# Altium PCB PCB1.PcbDoc (part 2 of 3)
Units mil, origin at the board's own origin, x right, y up, seen from the top; angles counter-clockwise.
Board outline 3937.01 x 3937.01 mil, 4 copper layers (L1, L2, L3, L4), stack 61.851 mil thick; 165 components, 197 nets, 827 pads, 400 vias.
Unrouted connection lines stored in the file: 1.
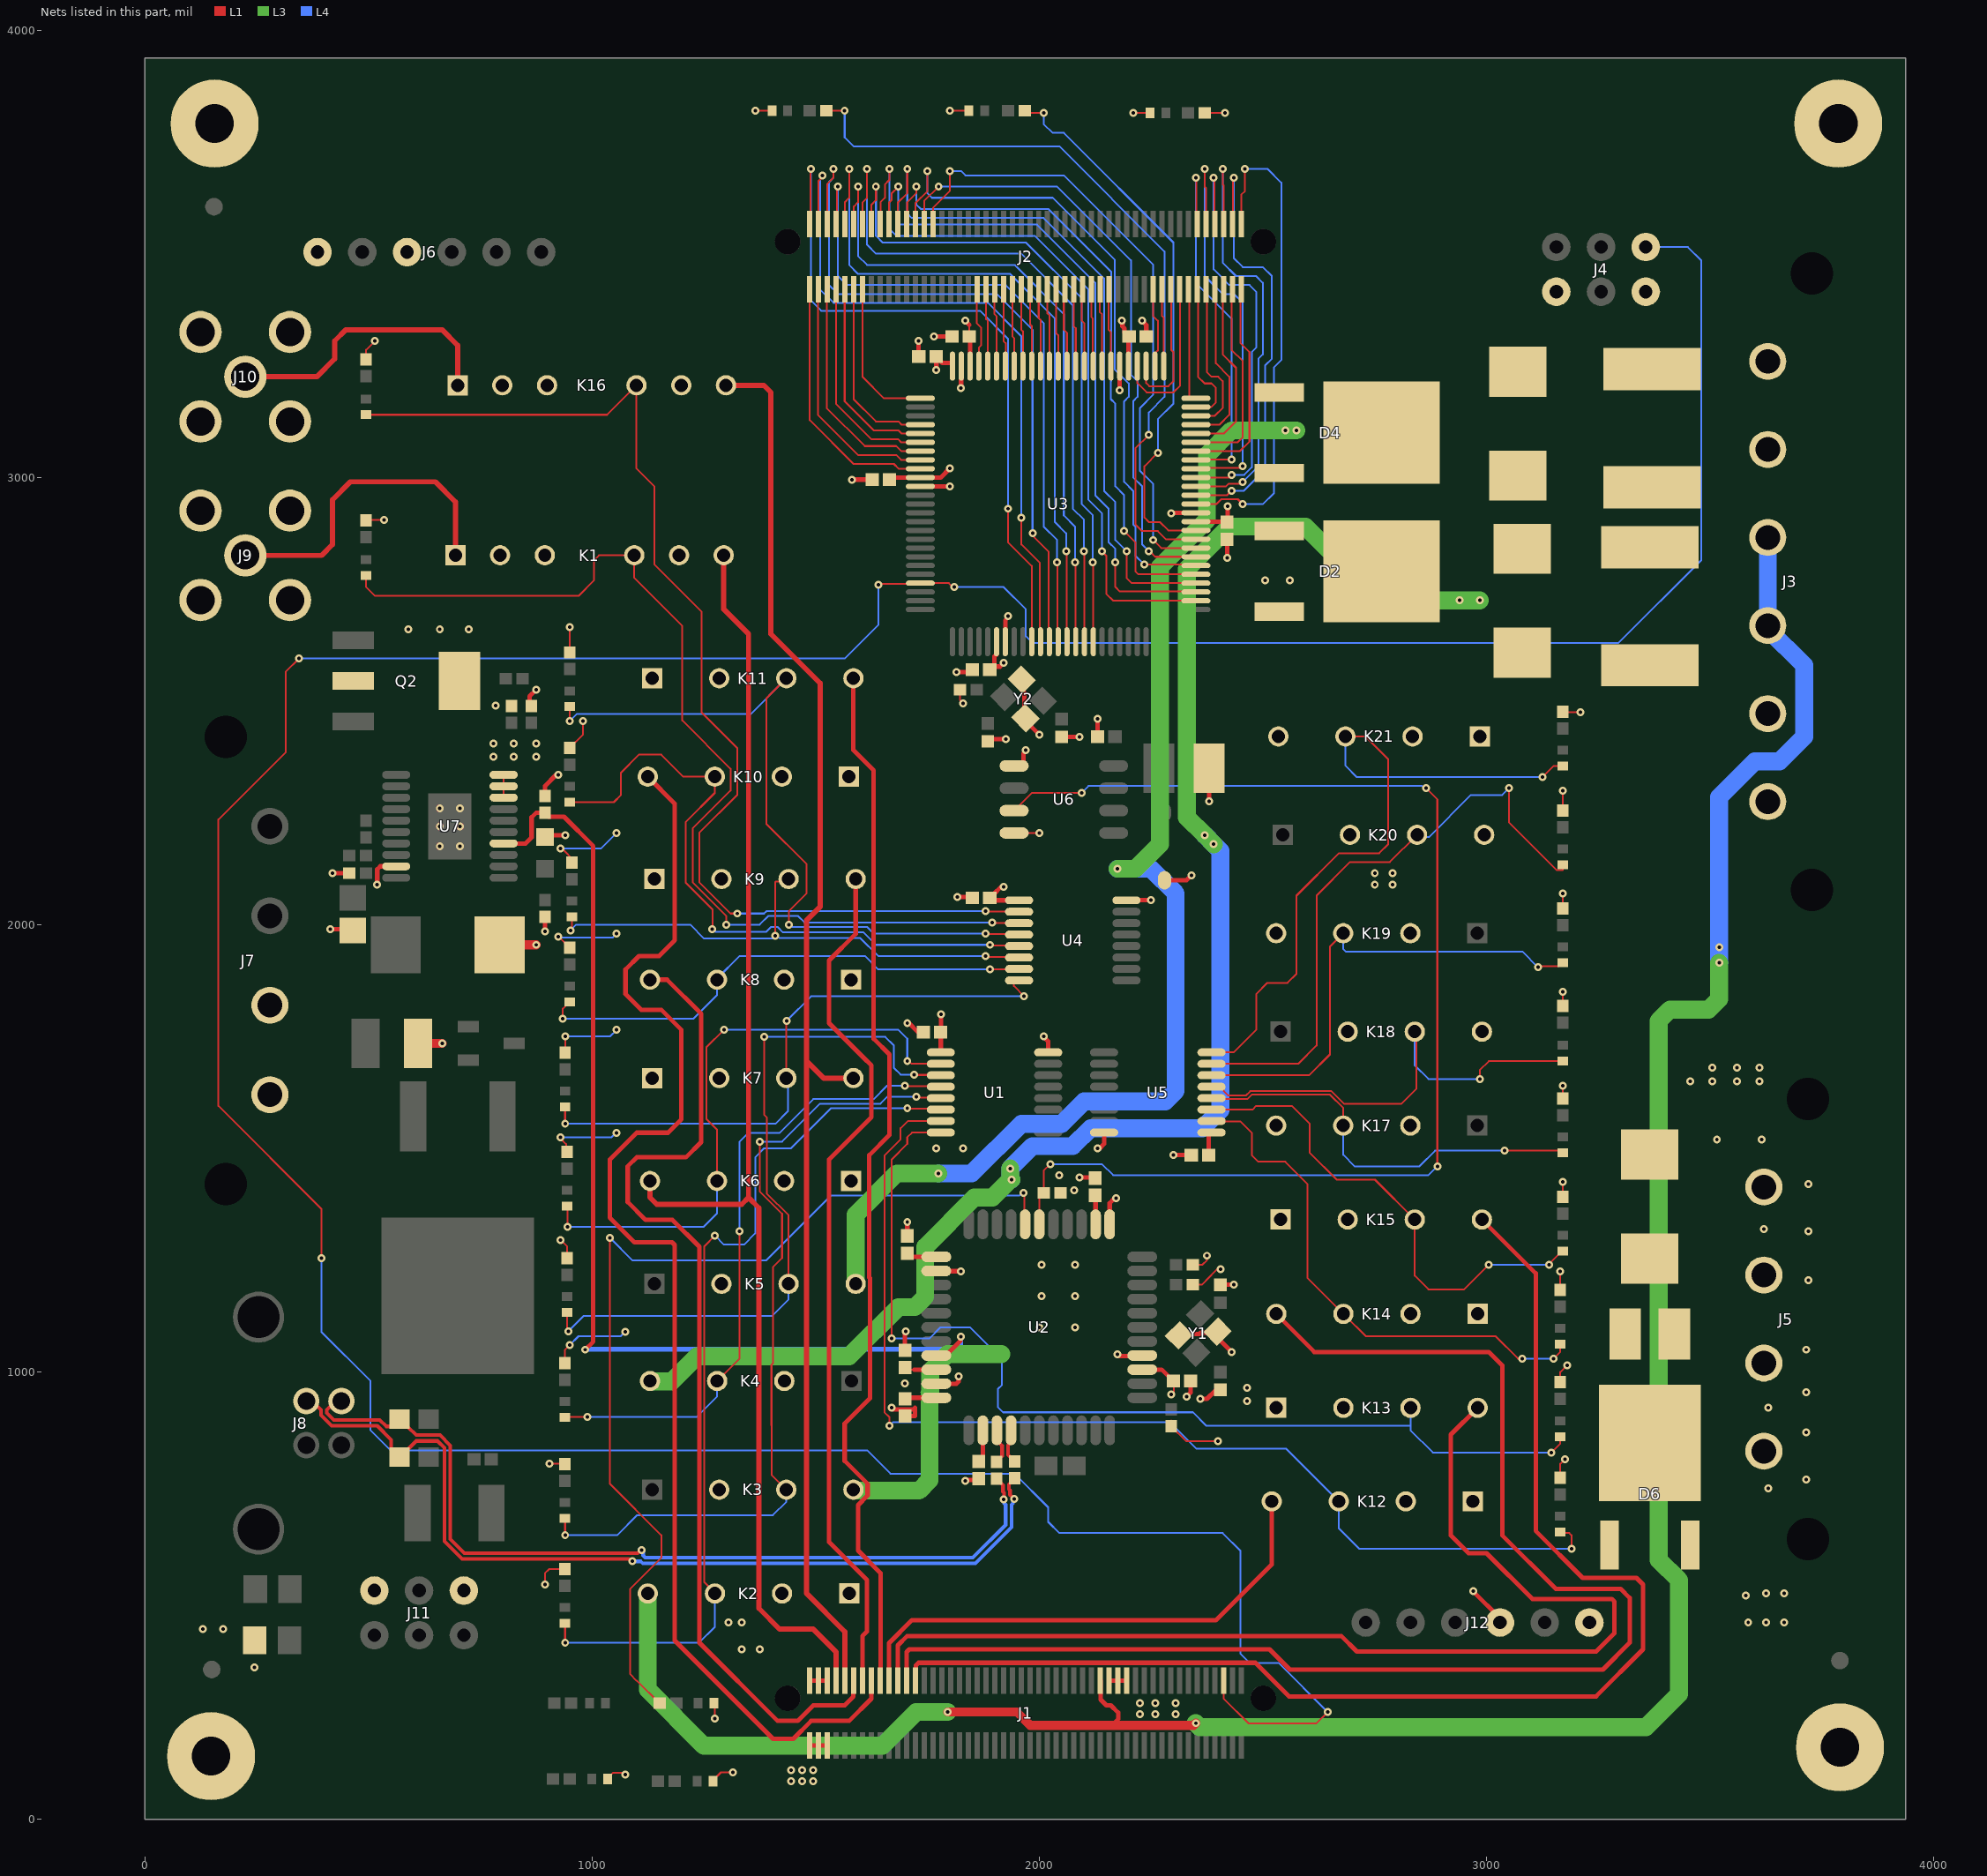
[diagram p4: the nets of this part, all layers, seen from the top]

## Part data (continued)
R18: library part R01-0402-01-00360-2, "RES SMD 100K OHM 1% 1/16W 0402", Case/Package=0402, Manufacturer=Yageo, Max Operating Temperature=155°C, Min Operating Temperature=-55°C, Power Rating=62.5mW, Temperature Coefficient="100 ppm/ºC", Tolerance=1%, Voltage Rating=50V, Composition="Thick Film", Features="Automotive AEC-Q200, Moisture Resistant", Height=370µm, Length=990.6µm, Manufacturer P/N=AC0402FR-07100KL, Number of Terminations=2, Packaging="Tape & Reel", RoHS=Yes, Width=508µm
R19: library part R01-0603-01-00000-4, "RES SMD 0 OHM 1% 1/10W 0603", Case/Package=0603, Manufacturer=Yageo, Max Operating Temperature=155°C, Min Operating Temperature=-55°C, Power Rating=100mW, Temperature Coefficient="200 ppm/ºC", Tolerance=1%, Voltage Rating=50V, Voltage Rating1=75V, Composition="Thick Film", Features="Automotive AEC-Q200, Moisture Resistant", Height=550µm, Length=1.6002µm, Manufacturer P/N=AC0603FR-070RL, Number of Terminations=2, Packaging="Tape & Reel", RoHS=Yes, Width=800µm
U1 U4 U5: library part CMP-0005-0001-00001-1, "50-V, 7-ch darlington transistor array, -40 to 105C 16-TSSOP -40 to 105", Case/Package=TSSOP, Manufacturer="Texas Instruments", Max Operating Temperature=-40°C, Min Operating Temperature=105°C, Voltage Rating=50V, Height=1.2mm, Length=5mm, Manufacturer P/N=ULN2003AIPWR, Mounting Technology=SMD, Pins=16, RoHS Compliant=yes, Width=4.4mm
U2: library part U01-0007-01-00002-1, "8-bit AVR MCU, 32 KB, 2560 Bytes, 16 MHz, 2.7 to 5.5V, TQFP-44, RoHS", Case/Package=TQFP, Frequency=16MHz, Manufacturer=Microchip/Atmel, Max Operating Temperature=85°C, Max Supply Voltage=5.5V, Min Operating Temperature=-40°C, Minimum Supply Voltage=2.7V, Contact Plating=-, Core Architecture=AVR, Height=1.05mm, Interface="I2C, I2S, SPI, UART, USART, USB", Manufacturer P/N=ATMEGA32U4-AU, Max Frequency=16MHz, Memory Size=32KB, Memory Type=Flash, Mounting Technology=SMD, Number of A/D=12, Number of I/O=26, Number of Programmable I/O=26, Oscillator Type=External, Peripherals="Brown-out Detect/Reset, POR, PWM, WDT", Pins=44, RAM Size="2.5 kB", RoHS=Yes, Watchdog Timer=Yes, Width=10mm
U3: library part U01-0007-01-00000-1, "AVR ATmega Microcontroller 8-bit 16MHz 256KB FLASH TQFP100", Case/Package=A, Frequency=16MHz, Manufacturer=Microchip, Max Operating Temperature=85°C, Max Supply Voltage=5.5V, Min Operating Temperature=-40°C, Minimum Supply Voltage=4.5V, Contact Plating=Tin, Core Architecture=AVR, Height=1.2mm, Interface="I2C, SPI, UART", Manufacturer P/N=ATMEGA2560-16AU, Max Frequency=16MHz, Memory Size=256KB, Memory Type=FLASH, Mounting Technology=SMD, Number of A/D="1 AD / 16 channels", Number of I/O=86, Number of Programmable I/O=86, Oscillator Type=External, Peripherals="Brown-out Detect/Reset, POR, PWM, WDT", Pins=100, RAM Size=8KB, RoHS=Yes, Watchdog Timer=Yes, Width=16.25mm
U6: library part CMP-00023-00003-1, "DS1682 Series 5.5 V I2C 2-Wire Serial Surface Mount Real Time Clock - SOIC-8", Case/Package=SOIC-8, Manufacturer=Maxim, Max Operating Temperature=85°C, Max Supply Voltage=5.5V, Min Operating Temperature=-40°C, Min Supply Voltage=2.5V, Height="1.5 mm", Interface=I2C, Length="5 mm", Manufacturer P/N=DS1682S+, Mounting Technology=SMD, Pins=8, RoHS Compliant=Yes, Width="4 mm"
U7: library part CMP-001-00084-4, "4.5-V to 60-V, 31mΩ, 0.6-6A eFuse with output power limiting and surge protection 20-HTSSOP -40 to 125", Manufacturer="Texas Instruments", Height=1.2mm, Length=6.5mm, Manufacturer P/N=TPS26631PWPR, Mounting Type=SMD, Number Pins=20, RoHS=Yes, Thickness=1mm, Width=4.4mm
Y1 Y2: library part Y01-0001-01-00000-11, "16MHz ±10ppm 16pF 80Ω SMD-2520_4P", Case/Package=SMD-2520_4P, Frequency=16MHz, Load Capacitance=16pF, Manufacturer=SEIKO-EPSON, Max Operating Temperature=85°C, Min Operating Temperature=-40°C, ESR=80, Manufacturer P/N=Q24FA20H0024700, Mounting Technology=SMD, Pins=4, RoHS Compliant=yes
Z1 Z2: library part Z01-0603-01-00000-1, "ESD Suppressor Multilayer Varistor 5V Automotive 2-Pin Case 0603", Capacitance=0.5pF, Case/Package=0603, Clamping Voltage=20V, Leakage Current=50nA, Manufacturer=Bourns, Max Operating Temperature=85°C, Min Operating Temperature=-40°C, Voltage=5V, Contact Plating=tin, Depth=800µm, Length=1.6mm, Manufacturer P/N=CG0603MLC-05E, Number Pins=2, Parameter=1ns, RoHS=Yes, Thickness=800µm, Width=800µm

## Via types
v1: diameter 17.72, hole 7.87, L1 to L4, 396 vias
v2: diameter 50, hole 28, L1 to L4, 4 vias

## Nets (pads, with @x,y where several pads share a name; then routed paths per layer and width w, separated by ;. In a path a pad name is that pad's centre, name@x,y a point inside that pad or via, vN(x,y) a via of type N, cw(c..) or ccw(c..) an arc to the next point about the centre after c; other vN are vias at no path point)
+5V: C1.2 C2.2 C3.2 C4.2 C5.2 C6.2 C7.2 C8.2 C9.2 C10.2 C11.2 C12.2 C13.2 C14.2 C16.2 D1.1 J1.1 J1.3 J1.5 J4.2 J6.1 J11.2 J12.1 K1.2 K2.2 K3.2 K4.2 K5.2 K6.2 K7.2 K8.2 K9.2 K10.2 K11.2 K12.2 K13.2 K14.2 K15.2 K16.2 K17.2 K18.2 K19.2 K20.2 K21.2 Q2.2 Q2.4 R1.2 R4.2 R5.2 R6.2 R7.2 R8.2 R21.1 R22.1 R23.1 R24.1 R25.1 R26.1 R27.1 R28.1 R29.1 R30.1 R31.1 R32.1 R33.1 R34.1 R35.1 R36.1 R37.1 R38.1 R39.1 R40.1 R41.1 R42.1 U1.9 U2.2 U2.14 U2.24 U2.34 U2.42 U2.44 U3.10 U3.31 U3.61 U3.80 U3.98 U3.100 U4.9 U5.9 U6.1 U7.18 U7.19 U7.20 | length 3515.4
  L1 w4: R22.1@495,2903.7 496.3,2905 v1(535,2905) ; R32.1@495,3263.7 495,3285 v1(515,3305) ; U7.18@802.6,2283.98 U7.19@802.6,2309.57 U7.20@802.6,2335.16 ; R8.2@818.7,2490 R8.2@820,2488.7 ; v1(895,525) 895,550 904.49,559.49 R28.1@939.66,559.49 ; v1(905,795) 939.23,795 R34.1@939.66,794.58 ; v1(925,1973.61) R24.1@950,1948.61 ; v1(930,1295) 944.66,1280.34 R23.1@944.66,1254.49 ; v1(930,1525) 930,1521.67 942.13,1509.54 942.13,1494.64 R29.1@944.66,1492.11 ; v1(930,2170) 933.61,2170 960,2143.61 R30.1@955,2138.61 ; R40.1@939.66,1019.49 939.66,1049.66 v1(950,1060) ; R35.1@940,1713.61 940.86,1714.47 v1(940.86,1750) ; R36.1@950,2395.11 980,2425.11 v1(980,2455) ; R41.1@950,2608.61 v1(950,2665) ; C9.2@1665,2995 C9.2@1665.31,2994.69 ; C1.2@1700,940 C1.2@1702.52,942.52 ; C2.2@1705,1265.71 C2.2@1713.23,1257.48 ; C4.2@1710,1020 C4.2@1700,1010 1704.49,1005.51 1720,1005.51 ; U2.44@1747.48,942.52 U2.44@1769.68,942.52 ; C10.2@1769.29,3270 1770,3269.29 C10.2@1781.46,3257.83 ; C16.2@1779.92,1753.5 1780,1753.58 C16.2@1781.42,1755 ; U3.100@1802.39,3257.83 1804.4,3255.81 1805.99,3254.22 U3.100@1805.99,3248.7 ; R1.2@1822.6,2525 1822.6,2502.4 v1(1830,2495) ; v1@1835,3349.47 v1(1835,3350) ; 1843.58,3340.88 C11.2@1843.58,3315 C11.2@1845.37,3313.22 ; C6.2@1864.14,799.14 C6.2@1865,800 C6.2@1874.02,809.02 ; C8.2@1899.43,2580 C8.2@1900,2580.57 ; U3.31@1904.42,2604.16 U3.31@1904.42,2632.56 ; U4.9@1930.38,2054.57 U4.9@1954.92,2054.57 ; R5.2@2045,1402.4 R5.2@2047.4,1400 ; C3.2@2125,1395 C3.2@2125.98,1394.02 ; C12.2@2192.85,3322.85 C12.2@2200.71,3315 C12.2@2199.7,3313.99 ; R7.2@2295,891.3 2301.3,885 R7.2@2295,878.7 2328.7,845 v1(2400,845) ; v1(2295,950) 2300.6,955.6 2300.6,979.4 C5.2@2300,980 C5.2@2299.21,980 ; R6.2@2343.7,1195 2363.48,1195 2373.41,1204.93 2373.41,1205.32 2398.09,1230 v1(2405,1230) ; R4.2@2343.7,1240 2365,1240 2375,1250 v1(2375,1260) ; R21.1@2370,3815 v1(2415,3815) ; U5.9@2378.58,1529.1 2384.92,1535.43 U5.9@2385.08,1535.43 ; R25.1@3165,763.7 3165,795 v1(3175,805) ; R31.1@3165,977.4 3165,1000 v1(3180,1015) ; R37.1@3165,1183.61 v1(3165,1225) ; R26.1@3170,1391.23 v1(3170,1425) ; R38.1@3170,1611.23 v1(3170,1640) ; R42.1@3170,1818.7 v1(3170,1850) ; R27.1@3170,2036.23 v1(3170,2070) ; R33.1@3170,2255 v1(3170,2300) ; R39.1@3170,2475.8 3170.8,2475 v1(3210,2475) ; J4.2@3355.97,3415 J4.2@3357.99,3415 ; C8.2@1889.29,2570 1896.41,2577.12 C8.2@1889.29,2570
  L1 w10: J1.1@1486.97,310.51 J1.3@1506.65,310.51 J1.5@1526.34,310.51 ; C9.2@1664.6,2999.69 U3.10@1734.14,2999.69 1779.69,2999.69 v1(1800,3020) ; C1.2@1702.52,942.52 U2.44@1747.48,942.52 ; C2.2@1713.23,1257.48 U2.34@1769.68,1257.48 ; 1720,1005.51 U2.42@1769.68,1005.51 ; v1(1770,3240) C10.2@1770,3269.29 ; U1.9@1779.92,1714.57 1779.92,1753.5 C16.2@1779.92,1753.66 ; C16.2@1780,1753.58 C16.2@1779.92,1753.66 ; v1(1780,1800) 1780,1763.58 C16.2@1779.92,1763.5 ; C10.2@1781.46,3257.83 1783.48,3255.81 1804.4,3255.81 1805.16,3255.81 1805.99,3254.97 U3.100@1805.99,3254.22 ; v1@1835,3349.47 1843.58,3340.88 ; U3.98@1845.37,3248.7 C11.2@1845.37,3313.22 ; C6.2@1863.71,799.57 C6.2@1864.14,799.14 ; C6.2@1874.02,809.02 U2.2@1874.02,869.68 ; C8.2@1896.41,2577.12 1912.12,2577.12 v1(1920,2585) ; C8.2@1900,2580.57 1900,2599.74 U3.31@1904.42,2604.16 ; v1(1920,2085) 1915.08,2085 1897.87,2067.79 1897.87,2055.95 1899.25,2054.57 U4.9@1930.38,2054.57 ; U6.1@1943.78,2355 1957.8,2355 1965,2362.2 1965,2382.91 1970,2387.91 v1(1970,2390) ; C3.2@2121.25,1398.75 C3.2@2125,1395 ; U2.24@2125.98,1330.31 C3.2@2125.98,1394.02 ; v1(2185,3350) 2186.1,3348.9 2186.1,3337.36 2190.75,3332.72 2190.75,3324.17 2192.07,3322.85 C12.2@2192.85,3322.85 ; U3.80@2199.7,3248.7 C12.2@2199.7,3313.99 ; U2.14@2230.31,1005.51 2273.7,1005.51 C5.2@2299.21,980 ; D1.1@2280,2099.21 2329.21,2099.21 v1(2340,2110) ; U3.61@2350.29,2901.26 2418.74,2901.26 C13.2@2420,2900 ; C7.2@2378.58,1485 U5.9@2378.58,1529.1 ; C13.2@2421.29,2905 v1(2421.29,2935.32) ; C16.2@1779.92,1753.66 1775,1758.58 C16.2@1779.92,1763.5 ; C16.2@1779.92,1753.66 C16.2@1779.92,1763.5
  L4 w4: v1(925,1973.61) 926.97,1971.64 1046.64,1971.64 v1(1055,1980) ; v1(930,1525) 1043.99,1525 1053.99,1535 v1(1055,1535) ; v1(930,2170) 1020,2170 v1(1055,2205) ; v1(940.86,1750) 1040,1750 v1(1055,1765) ; v1(950,1060) 970,1080 1063.99,1080 1073.99,1090 v1(1075,1090)
  other v1: 1335,380 1375,380 1305,440 1335,440 2465,935 2465,965 1700,975 2078.51,1406.49 2045,1440 1770,1500 1830,1500 2750,2090 2790,2090 2750,2115 2790,2115 780,2375 825,2375 875,2375 780,2405 825,2405 875,2405 785,2490 590,2660 660,2660 725,2660
+6V: D6.3 D8.2 F4.2 K3.4 K17.4 K18.4 K19.4 K20.4 | length 622.6
  L3 w4: 1736.33,955 1755.55,955 1759.68,955
  L3 w40: K3.4@1584.66,737.1 1585.67,736.09 1589.4,736.09 1590.49,735 1731.25,735 1754.68,758.43 1754.68,954.13 1755.55,955 1756,955.45 1756,1001.57 1794.43,1040 1915,1040
  other v1: 2000,1100 2080,1100 2005,1170 2080,1170 2005,1240 2080,1240 3455,1650 3505,1650 3560,1650 3610,1650 3505,1680 3560,1680 3610,1680
+6V_In: F4.1 J5.1 J5.2
  other v1: 3630,740 3715,760 3715,865 3630,920 3715,955 3715,1050
+20V: D2.3 D3.1 F2.2 K4.4 | length 3668.1
  L3 w4: K4.4@1130,980 K4.4@1131.72,978.28
  L3 w40: K4.4@1131.72,978.28 1132.44,978.99 1178.99,978.99 1235,1035 1575,1035 1685,1145 1721.57,1145 1745,1168.43 1745,1280 1855,1390 1895,1390 v1@1935,1430 ; v1(1935,1455) v1@1935,1430 ; v1(1937.86,1430) v1@1935,1430 ; v1(2390,2180) v1(2370,2200) 2330,2240 2330,2795 2425,2890 2595,2890 2760,2725 v1(2940,2725) v1(2985,2725)
  L4 w40: v1(1937.86,1430) 1935,1432.86 v1(1935,1455) 1985,1505 2075,1505 2115,1545 2365,1545 2405,1585 2405,2165 v1(2390,2180) v1(2370,2200)
+20V_In: F2.1 J3.1 J3.2
-20V: D4.1 D4.2 D5.2 F3.2 K5.4 | length 2835.4
  L1 w10: D4.2@2535,3011.5 D4.2@2536.65,3009.84
  L3 w40: K5.4@1589.66,1197.1 1589.66,1351.88 1681.77,1444 v1(1774.33,1444) ; v1(2175,2125) 2215,2125 2270,2180 2270,2800 2375,2905 2375,3050 2430,3105 v1(2575,3105)
  L4 w40: v1(1774.33,1444) 1849,1444 1960,1555 2050,1555 2100,1605 2281.57,1605 2305,1628.43 2305,2070 2250,2125 v1(2175,2125)
  other v1: 2550,3105
-20V_In: F3.1 J3.5 J3.6
A: J1.7 K1.4 K6.4 | length 2933.1
  L1 w11.55: K6.4@1129.66,1427.1 1129.66,1390.34 1145,1375 1335,1375 1350,1390 ; K1.4@1294.66,2825.88 1294.66,2705.34 1350,2650 1350,1390 ; J1.7@1546.02,310.51 1546.02,373.98 1494.79,425.21 1419.79,425.21 1373.22,471.78 1373.22,1366.78 1350,1390
ALARM: R13.1 U3.59 | length 1707.8
  L1 w4: R13.1@1523.7,3820 v1(1565,3820) ; v1(2245,3095) 2215,3065 2215,2895 2230,2880 2265,2880 2283.11,2861.89 U3.59@2350.29,2861.89
  L4 w4: v1(1565,3820) 1565,3760 1585,3740 2045,3740 2280,3505 2280,3180 2245,3145 v1(2245,3095)
B: J1.9 K7.4 K16.4 | length 3200.3
  L1 w11.55: K16.4@1299.66,3205.88 1384.12,3205.88 1400,3190 1400,2650 1510,2540 1510,2040 1480,2010 1480,1695 ; J1.9@1565.71,310.51 1565.71,419.29 1480,505 1480,1695 ; K7.4@1584.66,1657.1 1517.9,1657.1 1480,1695
C: J1.11 K8.4 | length 2261.6
  L1 w10: K8.4@1129.66,1877.1 1167.9,1877.1 1244,1801 1244,1514 1210,1480 1100,1480 1080,1460 1080,1380 1120,1340 1180,1340 1240,1280 1240,395 1415,220 1460,220 1495,255 1565,255 1584.63,274.63 1584.63,309.75 J1.11@1585.39,310.51
COIL1: D14.1 K1.3 U4.11 | length 2349
  L1 w4: D14.1@494.66,2780.44 494.66,2755.34 515,2735 970,2735 1005,2770 1005,2815 1015.88,2825.88 K1.3@1094.66,2825.88 1094.66,2775.34 1202,2668 1202,2456.69 1310,2348.69 1310,2300 1225,2215 1225,2095 1300,2020 v1(1300,2000) ; v1(1895,2005) 1895.81,2004.19 1954.11,2004.19 U4.11@1954.92,2003.39
  L4 w4: v1(1300,2000) 1375,2000 1395,2020 1460,2020 1475,2005 v1(1895,2005)
COIL2: D20.1 K2.3 U1.14 | length 2028
  L1 w4: D20.1@939.66,438.26 940,437.92 v1(940,395) ; K2.3@1274.66,507.1 1251,530.75 1251,1281 v1(1275,1305) ; v1(1705,1590) 1706.69,1588.31 1778.23,1588.31 U1.14@1779.92,1586.61
  L4 w4: v1(940,395) 1240,395 1274.66,429.66 K2.3@1274.66,507.1 ; v1(1275,1305) 1295,1285 1340,1285 1365,1310 1365,1480 1385,1500 1445,1500 1535,1590 v1(1705,1590)
COIL3: D26.1 K3.3 U1.13 | length 1860.9
  L1 w4: D26.1@939.66,673.26 940,672.92 v1(940,635) ; v1(1375,1515) 1375,1403.69 1425,1353.69 1425,1255 1405,1235 1405,1020 1401.36,1016.36 1401.36,881.13 1401.75,880.73 1401.75,770 K3.3@1434.66,737.1 ; v1(1725,1615) 1726.4,1613.6 1778.52,1613.6 U1.13@1779.92,1612.2
  L4 w4: v1(940,635) 1056.25,635 1101.25,680 1404.66,680 1434.66,710 K3.3@1434.66,737.1 ; v1(1375,1515) 1425,1515 1510,1600 1645,1600 1660,1615 v1(1725,1615)
COIL4: D32.1 K4.3 U1.12 | length 1453.2
  L1 w4: D32.1@939.66,898.26 940,897.92 942.08,900 v1(990,900) ; K4.3@1280,980 1330,1030 v1(1330,1315) ; v1(1700,1640) 1701.1,1638.9 1778.82,1638.9 U1.12@1779.92,1637.8
  L4 w4: v1(990,900) 1234.85,900 1280,945.15 K4.3@1280,980 ; v1(1330,1315) 1330,1515 1350,1535 1420,1535 1495,1610 1630,1610 1660,1640 v1(1700,1640)
COIL5: D15.1 K5.3 U1.11 | length 1633.9
  L1 w4: D15.1@944.66,1133.26 944.66,1094.06 v1(947.33,1091.38) ; v1(1385,1749.14) 1385,1575.21 1390.86,1569.36 1390.86,1399.14 1439.66,1350.34 K5.3@1439.66,1197.1 ; v1(1720,1665) 1720.81,1664.19 1779.11,1664.19 U1.11@1779.92,1663.39
  L4 w4: v1(947.33,1091.38) 980.94,1125 1402.41,1125 1439.66,1162.25 K5.3@1439.66,1197.1 ; v1(1385,1749.14) 1655.86,1749.14 1675,1730 1675,1680 1690,1665 v1(1720,1665)
COIL6: D21.1 K6.3 U1.10 | length 1374.9
  L1 w4: D21.1@944.66,1370.88 945,1370.53 v1(945,1325) ; K6.3@1279.66,1427.1 1279.66,1541.79 1256.02,1565.43 1256.02,1726.02 v1(1295,1765) ; v1(1705,1695) 1708.71,1695 1714.74,1688.98 U1.10@1779.92,1688.98
  L4 w4: v1(945,1325) 1250,1325 1279.66,1354.66 K6.3@1279.66,1427.1 ; v1(1295,1765) 1685,1765 1705,1745 v1(1705,1695)
COIL7: D27.1 K7.3 U4.16 | length 1357.6
  L1 w4: v1(940,1555) D27.1@940,1592.38 ; K7.3@1434.66,1657.1 1434.83,1657.27 1434.83,1784.83 v1(1435,1785) ; U4.16@1954.92,1875.43 1949.6,1875.43 1943.26,1869.1 1943.26,1862.92 v1(1966.18,1840)
  L4 w4: v1(940,1555) 1410,1555 1438.34,1583.34 1438.34,1653.41 K7.3@1434.66,1657.1 ; v1(1435,1785) 1490,1840 v1(1966.18,1840)
COIL8: D16.1 K8.3 U4.15 | length 1156.3
  L1 w4: v1(935,1790) 935,1812.38 D16.1@950,1827.38 ; v1(1890,1900) 1890.51,1900.51 1954.41,1900.51 U4.15@1954.92,1901.02
  L4 w4: v1(935,1790) 1227.41,1790 1279.66,1842.25 K8.3@1279.66,1877.1 1279.66,1879.66 1330,1930 1610,1930 1640,1900 v1(1890,1900)
COIL9: D22.1 K9.3 U4.14 | length 1226.4
  L1 w4: v1(952.5,1987.5) 955,1990 D22.1@955,2017.38 ; v1(1410,1975) 1410,2095 1411.02,2096.02 1433.58,2096.02 K9.3@1439.66,2102.1 ; v1(1880,1930) 1881.69,1928.31 1953.23,1928.31 U4.14@1954.92,1926.61
  L4 w4: v1(952.5,1987.5) 965,2000 1220,2000 1250.86,1969.14 1404.14,1969.14 v1(1410,1975) 1413.71,1975 1418.71,1970 1600,1970 1640,1930 v1(1880,1930)
COIL10: D28.1 K10.3 U4.13 | length 1522.3
  L1 w4: D28.1@950,2273.88 1048.88,2273.88 1065,2290 1065,2340 1105,2380 1155,2380 1204.12,2330.88 K10.3@1274.66,2330.88 1274.66,2294.66 1210,2230 1210,2093.46 1270,2033.46 1270,1990.96 v1(1268.73,1989.69) ; v1(1890,1955) 1891.4,1953.6 1953.52,1953.6 U4.13@1954.92,1952.2
  L4 w4: v1(1268.73,1989.69) 1270.31,1989.69 1275.86,1984.14 1389.14,1984.14 1400,1995 1415,1995 1427,1983 1607,1983 1635,1955 v1(1890,1955)
COIL11: D33.1 K11.3 U4.12 | length 1704.1
  L1 w4: v1(950,2455) D33.1@950,2487.38 ; K11.3@1434.66,2550.88 1390,2506.22 1390,2225 1480,2135 1480,2070 1440,2030 v1(1440,2000) ; v1(1880,1980) 1881.1,1978.9 1953.82,1978.9 U4.12@1954.92,1977.8
  L3 w4: v1(1440,2000) v1@1443.71,2000
  L4 w4: v1(950,2455) 965.86,2470.86 1354.64,2470.86 K11.3@1434.66,2550.88 ; v1@1443.71,2000 1448.71,1995 1615,1995 1630,1980 v1(1880,1980)
COIL12: D17.1 K12.3 U1.15 | length 2521.2
  L1 w4: v1(1665,880) 1665,898.8 1654.14,909.66 1654.14,1484.14 1690,1520 1690,1545 1706.02,1561.02 U1.15@1779.92,1561.02 ; D17.1@3165,642.47 3167.47,640 3185,640 3190,635 v1(3190,605) v1@3188.99,605
  L4 w4: v1(1665,880) 1673.17,888.17 2291.83,888.17 2350.86,829.14 2551.39,829.14 K12.3@2669.66,710.88 2669.66,650.34 2715,605 v1(3190,605)
COIL13: D23.1 K13.3 U1.16 | length 2309.4
  L1 w4: v1(1670,1075) 1670,1475 1705,1510 1705,1525 1715.43,1535.43 U1.16@1779.92,1535.43 ; v1(3145,820) 3165,840 D23.1@3165,855
  L4 w4: v1(1670,1075) 1754.47,1075 1779.47,1100 1845,1100 1916.72,1028.28 1916.72,971.53 1908,962.81 1908,921.06 1919.06,910 2343.74,910 2373.74,880 2830,880 ; K13.3@2830,920 2830,880 ; v1(3145,820) 2880,820 2830,870 2830,880
COIL14: D29.1 K14.3 U5.10 | length 1178.7
  L1 w4: U5.10@2385.08,1561.02 2386.1,1560 2450,1560 2475,1535 2475,1485 2490,1470 2550,1470 2600,1420 2600,1210 K14.3@2680,1130 2685,1130 2685,1125 2730,1080 3020,1080 3070,1030 v1(3080,1030) ; v1(3150,1030) 3165,1045 D29.1@3165,1062.38
  L4 w4: v1(3080,1030) v1(3150,1030)
COIL15: D18.1 K15.3 U5.11 | length 1106.2
  L1 w4: U5.11@2385.08,1586.61 2476.61,1586.61 2485,1595 2565,1595 2605,1555 2605,1490 2665,1430 2750.53,1430 K15.3@2839.66,1340.88 2839.66,1215.34 2870,1185 2950,1185 v1(3005,1240) ; v1(3140,1240) 3140,1241.97 3168.03,1270 D18.1@3170,1270
  L4 w4: v1(3005,1240) v1(3140,1240)
COIL16: D24.1 K16.3 U4.10 | length 2621.5
  L1 w4: D24.1@495,3140 1033.78,3140 K16.3@1099.66,3205.88 1099.66,3020.03 1140,2979.68 1140,2805 1245,2700 1245,2475 1325,2395 1325,2290 1240,2205 1240,2095 1310,2025 v1(1325,2025) ; v1(1880,2030) 1880.51,2029.49 1954.41,2029.49 U4.10@1954.92,2028.98
  L3 w4: v1(1325,2025) v1@1327.62,2022.38
  L4 w4: v1(1325,2025) 1385,2025 1390,2030 v1(1880,2030)
COIL17: D30.1 K17.3 U5.12 | length 934.3
  L1 w4: U5.12@2385.08,1612.2 2387.28,1610 2465,1610 2475,1620 2650,1620 2679.66,1590.34 K17.3@2679.66,1550.88 ; v1(3040,1495) 3165,1495 D30.1@3170,1490
  L4 w4: K17.3@2679.66,1550.88 2679.66,1485.34 2705,1460 2850,1460 2885,1495 v1(3040,1495)
COIL18: D34.1 K18.3 U5.13 | length 1072.3
  L1 w4: U5.13@2385.08,1637.8 2404,1637.8 2411.93,1629.87 2411.93,1629 2422.93,1618 2461.69,1618 2471.69,1628 2653.31,1628 2681.31,1600 2810,1600 2843.34,1633.34 2843.34,1757.19 K18.3@2839.66,1760.88 ; v1(2985,1655) 2985,1675 3005,1695 D34.1@3170,1695
  L4 w4: K18.3@2839.66,1760.88 2839.66,1685.34 2870,1655 v1(2985,1655)
COIL19: D19.1 K19.3 U5.14 | length 1114.1
  L1 w4: U5.14@2385.08,1663.39 2603.39,1663.39 2650,1710 2650,1951.22 K19.3@2679.66,1980.88 ; v1(3115,1905) 3117.16,1907.16 3162.16,1907.16 D19.1@3170,1915
  L4 w4: K19.3@2679.66,1980.88 2679.66,1945.34 2685,1940 3080,1940 v1(3115,1905)
COIL20: D25.1 K20.3 U5.15 | length 1372.4
  L1 w4: U5.15@2385.08,1688.98 2578.98,1688.98 2620,1730 2620,2065 2695,2140 2783.78,2140 K20.3@2844.66,2200.88 ; v1(3050,2305) 3050,2229.29 3157.36,2121.93 3170,2121.93 D25.1@3170,2133.77
  L4 w4: K20.3@2844.66,2200.88 2849.58,2195.95 2870.95,2195.95 2965,2290 3035,2290 v1(3050,2305)
COIL21: D31.1 K21.3 U5.16 | length 1615.1
  L1 w4: U5.16@2385.08,1714.57 2434.57,1714.57 2485,1765 2485,1845 2510,1870 2555,1870 2575,1890 2575,2065 2670,2160 2760,2160 2780,2180 2780,2370 2729.12,2420.88 K21.3@2684.66,2420.88 ; v1(3125,2330) 3149.57,2354.57 D31.1@3170,2354.57
  L4 w4: K21.3@2684.66,2420.88 2684.66,2355.34 2710,2330 v1(3125,2330)
COM: D2.1 D2.2 D3.2 D4.3 D5.1 J1.67 J3.3 J3.4 K2.4 K21.4 | length 5635.7
  L1 w10: J1.67@2136.57,310.51 2137.48,309.61 2137.48,267.52 2150,255 2160,255 2176.41,238.59 2176.41,223.98 2162.44,210
  L1 w20: v1(1795,240) 1950,240 1980,210 2162.44,210 2345,210 v1(2350,215)
  L3 w40: K2.4@1125,505 1125,290 1250,165 1650,165 1725,240 v1(1795,240) ; v1(2350,215) 2358.86,206.14 3356.14,206.14 3430,280 3430,535 3385,580 3385,1785 3410,1810 3496.57,1810 3520,1833.43 v1(3520,1915)
  L4 w40: v1(3520,1915) v1(3520,1950) 3520,2285 3600,2365 3655,2365 3710,2420 3710,2580 3628.74,2661.26 J3.3@3628.74,2668.7 J3.4@3628.74,2865.55
  other v1: 2505,2770 2560,2770
D: J1.13 K9.4 | length 1934.4
  L1 w10: K9.4@1589.66,2102.1 1589.66,1979.66 1530,1920 1530,1780 1605.8,1704.2 1606,1704.2 1625,1685.2 1625,1570.05 1530,1475.05 1530,620.2 1615,535.2 1615,420 1605.08,410.08 J1.13@1605.08,310.51
D_N: R2.2 U2.3 | length 80.6
  L1 w8.1: R2.2@1905,798.7 1905,799.69 1916.9,811.59 1916.9,835.53 1905.51,846.91 U2.3@1905.51,869.68
D_P: R3.2 U2.4 | length 79.4
  L1 w8.1: U2.4@1937.01,869.68 1937.01,843.83 1930,836.82 1930,815 1935.27,809.73 1936.25,809.73 1945,800.98 R3.2@1945,800
DATA: R16.1 U3.60 | length 1238.4
  L1 w4: R16.1@1967.4,3820 1972.4,3815 v1(2010,3815) ; v1(2265,3055) 2235,3025 2235,2910 2245,2900 2270,2900 2288.42,2881.58 U3.60@2350.29,2881.58
  L4 w4: v1(2010,3815) 2010,3790 2030,3770 2055,3770 2300,3525 2300,3165 2265,3130 v1(2265,3055)
DATA_N: J8.2 R2.1 Z1.1 | length 1979
  L1 w8.1: J8.2@440.08,935 426.67,935 407.26,915.59 407.26,908.88 423.04,893.1 525.43,893.1 540,878.53 553.04,878.53 Z1.1@559.51,885 ; Z1.1@570.04,895 571.02,895 Z1.1@588.63,877.4 ; Z1.1@588.63,877.36 606.94,859.04 660.12,859.04 683.24,835.92 683.24,626.76 715,595 1101.8,595 1108.4,601.6 v1(1111,601.6) ; R2.1@1905,761.3 1905,760.31 1913.75,751.57 1914.26,751.57 1919.01,746.82 1919.01,732.6 1921.55,730.06 1921.55,716.55 v1(1920,715)
  L4 w8.1: v1@1107.5,605.1 1114.5,598.1 1114.5,589.89 1119.25,585.15 1851.62,585.15 1924.81,658.33 1924.81,703.2 1921.84,706.17 1921.84,713.16 v1(1920,715)
DATA_P: J8.3 R3.1 Z2.1 | length 2055.2
  L1 w8.1: J8.3@361.34,935 374.75,935 394.16,915.59 394.16,903.45 417.61,880 520,880 551.41,848.59 551.41,827.6 569.02,810 Z2.1@570,810 570.98,810 606.93,845.94 654.69,845.94 670.14,830.49 670.14,621.33 709.57,581.9 1082.37,581.9 1087.42,576.86 v1(1090.02,576.86) ; v1(1944.3,716.58) 1943.74,716.58 1937.91,722.41 1934.65,725.68 1934.65,735.49 1932.11,738.03 1932.11,748.72 1945,761.61 R3.1@1945,762.6
  L4 w8.1: v1(1090.02,576.86) 1090.17,576.71 1109.16,576.71 1113.82,572.05 1857.05,572.05 1937.91,652.91 1937.91,703.2 1940.88,706.17 1940.88,713.16 v1(1944.3,716.58)
E: J1.15 K10.4 | length 2931.4
  L1 w10: K10.4@1124.66,2330.88 1185,2270.53 1185,1965 1150,1930 1105,1930 1075,1900 1075,1845 1110,1810 1155,1810 1200,1765 1200,1565 1170,1535 1100,1535 1040,1475 1040,1345 1095,1290 1179.14,1290 1185,1284.14 1185,400 1405,180 1450,180 1490,220 1575,220 1624.76,269.76 J1.15@1624.76,310.51
ETI_ALARM: R5.1 U2.28 U6.3 | length 2830.1
  L1 w4: U6.3@1943.78,2255 1983.78,2295 v1(2095,2295) ; U2.28@2000,1330.31 2000,1390 R5.1@2010,1400 2010,1450 v1(2025,1465) ; v1(2865,2305) 2890,2280 v1(2890,1460)
  L4 w4: v1(2025,1465) 2140,1465 2165,1440 2870,1440 v1(2890,1460) ; v1(2095,2295) 2110,2310 2856.29,2310 2861.29,2305 v1(2865,2305)
ETI_ALARM_LED: R11.1 U2.29 | length 2223.9
  L1 w4: v1(1040,1300) 1040,750 1155,635 1155,585 1085,515 1085,325 1100,310 1100.4,310 1150.4,260 R11.1@1151.39,260 ; v1(1965,1400) 1966.75,1398.25 1966.75,1332.07 U2.29@1968.5,1330.31
  L4 w4: v1(1040,1300) 1090,1250 1390,1250 1535,1395 1956.29,1395 1961.29,1400 v1(1965,1400)
F: J1.17 K11.4 | length 2367.1
  L1 w10: K11.4@1584.66,2550.88 1584.66,2390.34 1630,2345 1630,1745 1665,1710 1665,1530 1620,1485 1620,1211.5 1621.3,1210.2 1621.3,996.71 1621.3,941.3 1565,885 1565,801.5 1616.3,750.2 1616.3,723.99 1595,702.7 1595,600.89 1645,550.89 1645,311.06 J1.17@1644.45,310.51
FGEN: J9.1 K1.1 | length 734.3
  L1 w11.55: J9.1@225,2825.64 395.64,2825.64 420,2850 420,2950 460,2990 650,2990 694.66,2945.34 K1.1@694.66,2825.88
FGEN1: J10.1 K16.1 | length 645.4
  L1 w11.55: J10.1@225,3225 385,3225 425,3265 425,3305 450,3330 665,3330 699.66,3295.34 K16.1@699.66,3205.88
G: J1.19 K12.4 | length 1153.1
  L1 w10: J1.19@1664.13,310.51 1664.13,394.13 1715,445 2395,445 2519.66,569.66 K12.4@2519.66,710.88
GND: C1.1 C2.1 C3.1 C4.1 C5.1 C6.1 C7.1 C8.1 C9.1 C10.1 C11.1 C12.1 C13.1 C14.1 C16.1 C18.1 C19.1 C20.1 C21.1 C22.1 C23.1 C24.1 C25.1 D6.1 D6.2 D7.1 D8.1 D9.2 D10.1 D11.1 D13.1 D35.1 D36.1 J1.2 J1.4 J1.6 J1.69 J1.71 J1.73 J4.6 J5.3 J5.4 J6.3 J7.3 J7.4 J9.2 J9.3 J9.4 J9.5 J10.2 J10.3 J10.4 J10.5 J11.6 J12.3 K1.5 K1.6 K2.1 K6.1 K7.1 K8.1 K9.1 K10.1 K11.1 K12.1 K13.1 K14.1 K15.1 K16.5 K16.6 K21.1 L2.2 MH1.1 MH2.1 MH3.1 MH4.1 R10.1 R12.2 R14.2 R18.1 R19.1 U1.8 U2.15 U2.23 U2.35 U2.43 U3.11 U3.32 U3.62 U3.81 U3.99 U4.8 U5.8 U6.4 U7.9 Y1.2 Y1.4 Y2.2 Y2.4 | length 2887.7
  L1 w4: L2.2@245,399.43 L2.2@246.23,400.66 ; C25.1@462.17,1990 C25.1@465,1987.17 ; R19.1@895,2195.87 R19.1@899.13,2200 ; D11.1@1035,90 1035,91.97 1046.84,103.81 1070.76,103.81 v1(1074.57,100) ; D13.1@1270.43,85 1270.43,86.97 1288.46,105 v1(1315.43,105) ; D7.1@1272.62,260 1275,257.62 v1(1275,225) ; v1(1365,3820) D10.1@1402.38,3820 ; C2.1@1705,1304.29 C2.1@1705.71,1305 ; v1(1705,1780) v1@1708.71,1780 ; C16.1@1728.71,1760 C16.1@1740.71,1760 ; C10.1@1730,3270.71 C10.1@1730.71,3270 ; U2.35@1769.68,1225.98 U2.35@1770.18,1225.49 ; v1(1800,3820) D35.1@1842.38,3820 ; v1@1824.51,1225.49 v1(1825,1225) ; v1(1825,3200) v1@1825.34,3200.34 ; U3.99@1825,3250 1825.34,3249.66 1825.68,3249.32 U3.99@1825.68,3248.7 ; C14.1@1848.5,2062.21 C14.1@1850.71,2060 ; C22.1@1890,2420 C22.1@1895,2415 ; v1@1930,2686.29 v1(1930,2690) ; U6.4@1943.78,2205 v1(2000,2205) ; Y2.4@1960.82,2520.36 1960.82,2524.6 1960.82,2534.25 Y2.4@1960.82,2548.15 ; v1@2010,1749.14 v1(2010,1750) ; C23.1@2050,2419.92 C23.1@2050.08,2420 ; C3.1@2123.58,1435 C3.1@2125,1433.58 ; v1(2130,1500) 2130.84,1499.16 v1@2134.16,1499.16 ; C20.1@2130,2420.71 C20.1@2130.71,2420 ; J1.69@2156.26,310.51 J1.69@2157.56,309.21 ; J1.71@2172.04,310.51 2173.94,308.61 2173.94,308.51 J1.71@2175.94,310.51 ; v1(2175,1040) v1@2179,1036 ; U3.81@2180.01,3248.7 U3.81@2180.01,3249.99 ; U4.8@2195.08,2054.57 U4.8@2195.3,2054.78 ; v1(2210,3815) D36.1@2247.38,3815 ; U2.15@2229.31,1036 U2.15@2230.31,1037.01 ; v1@2249.78,2054.78 v1(2250,2055) ; v1(2295,2920) v1@2295.47,2920.47 ; U3.62@2349.81,2920.47 U3.62@2350.29,2920.95 ; 2365.36,1089.18 Y1.2@2386.2,1089.18 ; Y1.2@2393.15,1081.85 Y1.2@2393.15,1089.18 ; C19.1@2400,1195.08 C19.1@2400.08,1195 ; J12.3@3030,440 J12.3@3030,450
  L1 w10: v1(415,1990) C25.1@462.17,1990 ; v1(420,2115) R18.1@457.6,2115 ; v1(520,2090) 520,2123.74 526.69,2130.43 U7.9@562.44,2130.43 ; R10.1@865,2488.7 860.33,2493.37 860.33,2510.33 v1(875,2525) ; v1(895,1985) R14.2@895,2017.6 ; R12.2@895,2287.4 895,2310 920,2335 v1(925,2335) ; R19.1@899.13,2200 v1(940.86,2200) ; J1.2@1486.97,164.84 J1.4@1506.65,164.84 J1.6@1526.34,164.84 ; v1(1581.42,2995) C9.1@1626.42,2995 ; v1(1670,920) 1673.96,916.04 1717.9,916.04 1721.86,920 1721.86,901.42 C1.1@1700,901.42 ; C4.1@1700,1048.58 1700,1090 v1(1701.1,1091.1) ; v1(1705,1335) 1705,1305.71 C2.1@1705.71,1305 ; v1@1708.71,1780 C16.1@1728.71,1760 ; C10.1@1730,3270.71 v1(1730,3305) ; U3.11@1734.14,2980 v1(1800,2980) ; v1(1765,3315) C11.1@1805,3315 ; U2.35@1770.18,1225.49 v1@1824.51,1225.49 ; v1(1815,2565) 1845.71,2565 C8.1@1850.71,2570 ; v1(1816.5,2062.21) C14.1@1848.5,2062.21 ; v1(1820,990) 1820,978.9 1815.08,973.98 U2.43@1769.68,974.02 ; v1@1825.34,3200.34 U3.99@1825.34,3249.66 ; v1(1835,756.93) 1836.48,758.41 1861.99,758.41 C6.1@1865,761.42 ; C22.1@1895,2415 v1(1925,2415) ; U3.32@1924.11,2632.56 1924.11,2680.39 v1@1930,2686.29 ; Y2.4@1960.82,2534.25 1960.82,2524.6 1967.14,2518.29 1967.14,2487.44 1967.78,2486.79 1967.78,2461.85 1967.78,2457.22 v1(2000,2425) ; v1@2010,1749.14 2020.08,1739.07 U1.8@2020.08,1714.57 ; C23.1@2050.08,2420 v1(2090,2420) ; v1(2090,1435) C3.1@2123.58,1435 ; C20.1@2130,2420.71 v1(2130,2460) ; v1@2134.16,1499.16 2144.92,1509.92 U5.8@2144.92,1535.43 ; J1.69@2156.26,310.51 J1.71@2172.04,310.51 ; U2.23@2157.48,1330.31 2157.48,1377.48 2167.08,1387.08 2169.96,1387.08 v1(2171.44,1388.56) ; J1.71@2175.94,310.51 J1.73@2195.63,310.51 ; v1@2179,1036 U2.15@2229.31,1036 ; v1(2180,3195) U3.81@2180.01,3249.99 ; U4.8@2195.3,2054.78 v1@2249.78,2054.78 ; v1(2230,3350) 2239.29,3340.71 C12.1@2239.29,3315 ; v1@2295.47,2920.47 U3.62@2349.81,2920.47 ; v1(2300,1485) C7.1@2340,1485 ; Y1.4@2306.85,1080.82 2309.46,1083.44 2337.39,1083.44 2338.8,1084.84 2358.36,1084.84 2361.3,1087.78 2384.81,1087.78 2386.2,1089.18 Y1.2@2393.15,1089.18 ; v1(2330,945) 2330,945.84 2338.58,954.42 C5.1@2338.58,980 ; v1(2360,940) 2375.08,940 C18.1@2395,959.92 ; v1(2380,2275.86) C21.1@2380,2350 ; Y1.2@2393.15,1081.85 v1(2430,1045) ; C19.1@2400.08,1195 v1(2435,1195) ; v1(2420,2820) C13.1@2420,2861.42 ; v1(2970,510) J12.3@3030,450 ; U2.43@1769.68,974.02 U2.43@1769.68,974.02
  L1 w20: L2.2@239.68,407.21 L2.2@246.23,400.66 ; C24.1@611.57,1735 v1(665,1735) ; D9.2@793.66,1955 v1(875,1955)
  other v1: 1445,85 1470,85 1495,85 1445,110 1470,110 1495,110 2225,235 2260,235 2305,235 2225,260 2260,260 2305,260 245,340 130,425 175,425 3585,440 3625,440 3665,440 3580,500 3625,505 3665,505 3720,1205 3720,1315 3620,1320 3720,1420 3515,1520 3615,1520 660,2175 705,2175 660,2220 705,2220 660,2260 705,2260
GPIO1: J2.2 U3.9 | length 584.9
  L1 w4: J2.2@1486.97,3420.75 1486.97,3128.03 1585,3030 1675,3030 1685.63,3019.37 U3.9@1734.14,3019.37
GPIO2: J2.4 U3.8 | length 552.4
  L1 w4: J2.4@1506.65,3420.75 1505,3419.09 1505,3140 1595,3050 1680,3050 1690.94,3039.06 U3.8@1734.14,3039.06
GPIO3: J2.6 U3.7 | length 515.3
  L1 w4: J2.6@1526.34,3420.75 1525,3419.41 1525,3155 1610,3070 1680,3070 1691.26,3058.74 U3.7@1734.14,3058.74
GPIO4: J2.8 U3.6 | length 480.3
  L1 w4: J2.8@1546.02,3420.75 1546.02,3163.98 1625,3085 1685,3085 1691.57,3078.43 U3.6@1734.14,3078.43
GPIO5: J2.10 U3.5 | length 450
  L1 w4: J2.10@1565.71,3420.75 1565,3420.04 1565,3170 1630,3105 1685,3105 1691.89,3098.11 U3.5@1734.14,3098.11
GPIO6: J2.12 U3.4 | length 418.7
  L1 w4: J2.12@1585.39,3420.75 1585,3420.35 1585,3175 1635,3125 1685,3125 1692.2,3117.8 U3.4@1734.14,3117.8
GPIO7: J2.14 U3.1 | length 344.9
  L1 w4: J2.14@1605.08,3420.75 1605,3420.67 1605,3225 1653.15,3176.85 U3.1@1734.14,3176.85
GPIO8: J2.40 U3.97 | length 178.6
  L1 w4: J2.40@1860.98,3420.75 1860,3419.76 1860,3345 1870,3335 1870,3295 1865.05,3290.05 U3.97@1865.05,3248.7
GPIO9: J2.42 U3.96 | length 173.9
  L1 w4: J2.42@1880.67,3420.75 1880.67,3354.33 1885,3350 1885,3248.97 U3.96@1884.74,3248.7
GPIO10: J2.44 U3.95 | length 174
  L1 w4: J2.44@1900.35,3420.75 1900,3420.39 1900,3365 1904.42,3360.58 U3.95@1904.42,3248.7
GPIO11: J2.46 U3.94 | length 174.5
  L1 w4: J2.46@1920.04,3420.75 1920.04,3304.96 1925,3300 1925,3249.6 U3.94@1924.11,3248.7
GPIO12: J2.48 U3.93 | length 173.7
  L1 w4: J2.48@1939.72,3420.75 1939.72,3315.28 1943.79,3311.21 U3.93@1943.79,3248.7
GPIO13: J2.50 U3.92 | length 173.7
  L1 w4: J2.50@1959.41,3420.75 1959.41,3330.59 1963.48,3326.52 U3.92@1963.48,3248.7
GPIO14: J2.52 U3.91 | length 173.7
  L1 w4: J2.52@1979.09,3420.75 1980,3419.84 1980,3341.66 1983.16,3338.5 U3.91@1983.16,3248.7
GPIO15: J2.54 U3.90 | length 173.7
  L1 w4: J2.54@1998.78,3420.75 1998.78,3356.22 2002.85,3352.15 U3.90@2002.85,3248.7
GPIO16: J2.56 U3.89 | length 173.7
  L1 w4: J2.56@2018.46,3420.75 2018.46,3366.54 2022.53,3362.47 U3.89@2022.53,3248.7
GPIO17: J2.58 U3.88 | length 173.7
  L1 w4: J2.58@2038.15,3420.75 2038.15,3321.85 2042.22,3317.78 U3.88@2042.22,3248.7
GPIO18: J2.60 U3.87 | length 176.1
  L1 w4: J2.60@2057.83,3420.75 2055,3417.91 2055,3330 2061.9,3323.1 U3.87@2061.9,3248.7
GPIO19: J2.62 U3.86 | length 173.7
  L1 w4: J2.62@2077.52,3420.75 2077.52,3337.48 2081.59,3333.41 U3.86@2081.59,3248.7
GPIO20: J2.64 U3.85 | length 175.6
  L1 w4: J2.64@2097.2,3420.75 2095,3418.54 2095,3350 2101.27,3343.73 U3.85@2101.27,3248.7
GPIO21: J2.66 U3.84 | length 173.7
  L1 w4: J2.66@2116.89,3420.75 2116.89,3358.11 2120,3355 2120,3249.66 U3.84@2120.96,3248.7
GPIO22: J2.68 U3.83 | length 175
  L1 w4: J2.68@2136.57,3420.75 2135,3419.17 2135,3370 2140.64,3364.36 U3.83@2140.64,3248.7
GPIO23: J2.70 U3.82 | length 174.8
  L1 w4: J2.70@2156.26,3420.75 2155,3419.49 2155,3330 2160.33,3324.67 U3.82@2160.33,3248.7
GPIO24: J2.80 U3.77 | length 178.9
  L1 w4: J2.80@2254.69,3420.75 2255,3420.43 2255,3360 2265,3350 2265,3283.64 2258.75,3277.39 U3.77@2258.75,3248.7
GPIO25: J2.82 U3.76 | length 173.7
  L1 w4: J2.82@2274.37,3420.75 2274.37,3360.63 2278.44,3356.56 U3.76@2278.44,3248.7
GPIO26: J2.84 U3.78 | length 314.5
  L1 w4: U3.78@2239.07,3248.7 2239.07,3210.93 2246.21,3203.79 2288.79,3203.79 2300,3215 2300,3280 2295,3285 2295,3419.8 J2.84@2294.06,3420.75
GPIO27: J2.86 U3.79 | length 364.7
  L1 w4: U3.79@2219.38,3248.7 2219.38,3210.62 2240,3190 2300,3190 2315,3205 2315,3419.49 J2.86@2313.74,3420.75
GPIO28: J2.88 U3.75 | length 257.7
  L1 w4: J2.88@2333.43,3420.75 2335,3419.17 2335,3180.46 2338.61,3176.85 U3.75@2350.29,3176.85
GPIO29: J2.90 U3.74 | length 328.4
  L1 w4: U3.74@2350.29,3157.17 2350.8,3157.68 2385.18,3157.68 2395,3167.5 2395,3200 2385,3210 2370,3210 2355,3225 2355,3418.86 J2.90@2353.11,3420.75
GPIO30: J2.92 U3.73 | length 356.9
  L1 w4: U3.73@2350.29,3137.48 2392.48,3137.48 2410,3155 2410,3215 2400,3225 2385,3225 2375,3235 2375,3418.54 J2.92@2372.8,3420.75
GPIO31: J2.94 U3.72 | length 378.1
  L1 w4: U3.72@2350.29,3117.8 2402.8,3117.8 2425,3140 2425,3225 2395,3255 2395,3418.23 J2.94@2392.48,3420.75
GPIO32: J2.96 U3.71 | length 409.9
  L1 w4: U3.71@2350.29,3098.11 2413.11,3098.11 2440,3125 2440,3245 2410,3275 2410,3418.58 J2.96@2412.17,3420.75
GPIO33: J2.98 U3.70 | length 451.4
  L1 w4: U3.70@2350.29,3078.43 2443.43,3078.43 2455,3090 2455,3260 2430,3285 2430,3418.9 J2.98@2431.85,3420.75
GPIO34: J2.100 U3.69 | length 478.2
  L1 w4: U3.69@2350.29,3058.74 2448.74,3058.74 2470,3080 2470,3280 2450,3300 2450,3419.21 J2.100@2451.54,3420.75
GPIO35: J2.89 U3.68 | length 848.1
  L1 w4: v1(2350,3670) 2351.56,3668.44 2351.56,3567.97 J2.89@2353.11,3566.42 ; U3.68@2350.29,3039.06 2350.76,3039.53 2429.53,3039.53 v1(2430,3040)
  L4 w4: v1(2350,3670) 2350,3435 2430,3355 v1(2430,3040)
GPIO36: J2.91 U3.67 | length 946.6
  L1 w4: U3.67@2350.29,3019.37 2351.77,3020.86 2450.86,3020.86 v1(2455,3025) ; v1(2370,3690) 2370,3650 2372.8,3647.2 J2.91@2372.8,3566.42
  L4 w4: v1(2370,3690) 2370,3450 2410,3410 2435,3410 2455,3390 v1(2455,3025)
GPIO37: J2.93 U3.66 | length 956.1
  L1 w4: U3.66@2350.29,2999.69 2350.44,2999.84 2424.84,2999.84 v1(2430,3005) ; v1(2390,3670) 2391.24,3668.76 2391.24,3567.66 J2.93@2392.48,3566.42
  L4 w4: v1(2390,3670) 2390,3465 2425,3430 2470,3430 2485,3415 2485,3290 2475,3280 2475,3022.57 2458.29,3005.86 2430.86,3005.86 v1(2430,3005)
GPIO38: J2.95 U3.65 | length 1015.6
  L1 w4: U3.65@2350.29,2980 2417.57,2980 2423.43,2985.86 2450.86,2985.86 v1(2455,2990) ; v1(2410,3690) 2410,3655 2412.17,3652.83 J2.95@2412.17,3566.42
  L4 w4: v1(2410,3690) 2410,3480 2440,3450 2485,3450 2500,3435 2500,3275 2490,3265 2490,3025 v1(2455,2990)
GPIO39: J2.97 U3.64 | length 1003.7
  L1 w4: U3.64@2350.29,2960.32 2350.45,2960.16 2420.16,2960.16 v1(2430,2970) ; J2.97@2431.85,3566.42 2433.43,3567.99 2433.43,3668.43 v1(2435,3670)
  L4 w4: v1(2430,2970) 2457.43,2970 2505,3017.57 2505,3250 2520,3265 2520,3450 2500,3470 2455,3470 2435,3490 v1(2435,3670)
GPIO40: J2.99 U3.63 | length 1116
  L1 w4: U3.63@2350.29,2940.63 2350.6,2940.32 2395.83,2940.32 2406.69,2951.17 2443.83,2951.17 v1(2455,2940) ; J2.99@2451.54,3566.42 2451.54,3631.54 2460,3640 v1(2460,3690)
  L4 w4: v1(2455,2940) 2500,2940 2525,2965 2525,3246.32 2541.13,3262.45 2541.13,3658.87 2510,3690 v1(2460,3690)
GPIO41: J2.1 U3.35 | length 1594.5
  L1 w4: J2.1@1486.97,3566.42 1488.48,3567.93 1488.48,3688.48 v1(1490,3690) ; v1(1930,2930) 1930,2855 1983.16,2801.84 U3.35@1983.16,2632.56
  L4 w4: v1(1490,3690) 1490,3395 1512.72,3372.28 1867.72,3372.28 1930,3310 v1(1930,2930)
GPIO42: J2.3 U3.36 | length 1562.8
  L1 w4: J2.3@1506.65,3566.42 1506.65,3662.94 1515,3671.29 v1(1515,3675) ; v1(1960,2910) 1960,2850 2001.42,2808.58 2001.42,2633.98 U3.36@2002.85,2632.56
  L4 w4: v1(1515,3675) 1515,3671.29 1510,3666.29 1510,3420 1540,3390 1885,3390 1960,3315 v1(1960,2910)
GPIO43: J2.5 U3.37 | length 1602.8
  L1 w4: J2.5@1526.34,3566.42 1526.34,3656.34 1540,3670 v1(1540,3690) ; v1(1985,2875) 1985,2870 2021.27,2833.73 2021.27,2633.83 U3.37@2022.53,2632.56
  L4 w4: v1(1540,3690) 1540,3670 1530,3660 1530,3430 1550,3410 1905,3410 1985,3330 v1(1985,2875)
GPIO44: J2.7 U3.38 | length 1514.5
  L1 w4: J2.7@1546.02,3566.42 1548.01,3568.41 1548.01,3648.01 v1(1550,3650) ; v1(2040,2810) 2041.11,2808.89 2041.11,2633.67 U3.38@2042.22,2632.56
  L4 w4: v1(1550,3650) 1550,3450 1570,3430 1925,3430 2010,3345 2010,2890 2040,2860 v1(2040,2810)
GPIO45: J2.9 U3.39 | length 1585.7
  L1 w4: J2.9@1565.71,3566.42 1565.71,3615.71 1575,3625 v1(1575,3690) ; v1(2060,2835) 2060.95,2834.05 2060.95,2633.51 U3.39@2061.9,2632.56
  L4 w4: v1(1575,3690) 1575,3475 1595,3455 1935,3455 2035,3355 2035,2900 2060,2875 v1(2060,2835)
GPIO46: J2.11 U3.40 | length 1499.9
  L1 w4: J2.11@1585.39,3566.42 1585.39,3605.39 1595,3615 v1(1595,3650) ; v1(2080,2810) 2080.79,2809.21 2080.79,2633.35 U3.40@2081.59,2632.56
  L4 w4: v1(1595,3650) 1595,3495 1615,3475 1945,3475 2055,3365 2055,2915 2080,2890 v1(2080,2810)
GPIO47: J2.13 U3.41 | length 1576.9
  L1 w4: J2.13@1605.08,3566.42 1605.08,3615.08 1615,3625 v1(1615,3690) ; v1(2100,2835) 2100.64,2834.36 2100.64,2633.2 U3.41@2101.27,2632.56
  L4 w4: v1(1615,3690) 1615,3520 1635,3500 1960,3500 2075,3385 2075,2930 2100,2905 v1(2100,2835)
GPIO48: J2.15 U3.42 | length 1494
  L1 w4: J2.15@1624.76,3566.42 1624.76,3609.76 1635,3620 v1(1635,3650) ; v1(2120,2810) 2120.48,2809.52 2120.48,2633.04 U3.42@2120.96,2632.56
  L4 w4: v1(1635,3650) 1635,3540 1650,3525 1970,3525 2095,3400 2095,2940 2120,2915 v1(2120,2810)
GPIO49: J2.17 U3.52 | length 1671.5
  L1 w4: J2.17@1644.45,3566.42 1645,3566.97 1645,3615 1655,3625 1655,3655 1665,3665 v1(1665,3690) ; v1(2140,2835) 2150,2825 2150,2740 2165.9,2724.1 U3.52@2350.29,2724.1
  L4 w4: v1(1665,3690) 1665,3555 1680,3540 1990,3540 2110,3420 2110,2950 2140,2920 v1(2140,2835)
GPIO50: J2.19 U3.53 | length 1551.7
  L1 w4: J2.19@1664.13,3566.42 1664.13,3614.13 1670,3620 1670,3635 v1(1685,3650) ; v1(2170,2810) 2170,2755 2180,2745 2349.07,2745 U3.53@2350.29,2743.78
  L4 w4: v1(1685,3650) 1685,3570 1690,3565 1995,3565 2125,3435 2125,2960 2155,2930 2155,2855 2170,2840 v1(2170,2810)
GPIO51: J2.21 U3.54 | length 1583.2
  L1 w4: J2.21@1683.82,3566.42 1683.82,3613.82 1705,3635 v1(1705,3690) ; v1(2195,2835) 2195,2775 2206.53,2763.47 U3.54@2350.29,2763.47
  L4 w4: v1(1705,3690) 1705,3590 1715,3580 2010,3580 2145,3445 2145,2970 2170,2945 2170,2860 v1(2195,2835)
GPIO52: J2.23 U3.55 | length 1461.5
  L1 w4: J2.23@1703.5,3566.42 1705,3567.91 1705,3615 1725,3635 v1(1725,3650) ; v1(2190,2880) 2215,2855 2215,2790 2221.85,2783.15 U3.55@2350.29,2783.15
  L4 w4: v1(1725,3650) 1725,3610 1735,3600 2020,3600 2161.14,3458.86 2161.14,3216.14 2160,3215 2160,3175 2170,3165 2170,2980 2190,2960 v1(2190,2880)
GPIO53: J2.25 U3.56 | length 1493.2
  L1 w4: J2.25@1723.19,3566.42 1723.19,3613.19 1750,3640 v1(1750,3685) ; v1(2235,2805) 2348.12,2805 U3.56@2350.29,2802.84
  L4 w4: v1(1750,3685) 1750,3635 1760,3625 2030,3625 2169.14,3485.86 2169.14,3240.86 2200,3210 2200,3180 2190,3170 2190,2990 2210,2970 2210,2895 2215,2890 2215,2825 v1(2235,2805)
GPIO54: J2.27 U3.57 | length 1380.5
  L1 w4: J2.27@1742.87,3566.42 1742.87,3617.87 v1(1775,3650) ; v1(2245,2835) 2246.72,2835 2259.2,2822.52 U3.57@2350.29,2822.52
  L4 w4: v1(1775,3650) 2040,3650 2205,3485 2205,3230 2220,3215 2220,3180 2210,3170 2210,3000 2230,2980 2230,2850 v1(2245,2835)
GPIO55: J2.29 U3.58 | length 1418.6
  L1 w4: J2.29@1762.56,3566.42 1762.56,3602.56 1800,3640 v1(1800,3685) ; v1(2255,2860) 2272.79,2842.21 U3.58@2350.29,2842.21
  L4 w4: v1(1800,3685) 1825,3685 1835,3675 2055,3675 2255,3475 2255,3185 2225,3155 2225,3015 2255,2985 v1(2255,2860)
H: J1.21 K13.4 | length 2528.8
  L1 w10: J1.21@1683.82,310.51 1683.82,388.82 1705,410 2675,410 2710,375 3245,375 3286,416 3286,486.89 3280.14,492.75 3102.37,492.75 3000,595.12 2959.88,595.12 2920,635 2920,860 K13.4@2980,920
I: J1.23 K14.4 | length 3101.7
  L1 w10: J1.23@1703.5,310.51 1703.5,374.14 1709.36,380 2515,380 2560,335 3260,335 3320,395 3320,495 3300,515 3155,515 3035,635 3035,1015 3005,1045 2615,1045 K14.4@2530,1130
IMON: R12.1 U2.41 U7.14 | length 2360.8
  L1 w4: U2.41@1769.68,1037.01 U2.41@1770.69,1036
  L1 w10: U7.14@802.6,2181.61 851.61,2181.61 865,2195 865,2240 875,2250 R12.1@895,2250 895,2249.02 902.8,2241.22 937.43,2241.22 1003,2175.65 1003,1068 v1(985,1050) ; U2.41@1770.69,1036 1790.33,1036 1823.52,1069.19 1823.52,1077.38 v1(1825,1078.86)
  L4 w10: v1(985,1050) 985.93,1050.93 1815.93,1050.93 1825,1060 v1(1825,1078.86)
J: J1.25 K15.4 | length 2917.3
  L1 w10: J1.25@1723.19,310.51 1724.09,311.42 1724.09,344.14 1729.95,350 2483.25,350 2558.25,275 3245,275 3350,380 3350,525 3335,540 3215,540 3110,645 3110,1220.53 K15.4@2989.66,1340.88
MISO: J1.95 J4.1 U3.22 | length 9032.8
  L1 w4: v1(345,2595) 315,2565 315,2385 165,2235 165,1595 395,1365 v1(395,1255) ; v1(1640,2760) 1641.97,2761.97 1732.65,2761.97 U3.22@1734.14,2763.47 1797.82,2763.47 1806.29,2755 v1(1810,2755) ; J1.95@2412.17,310.51 2412.17,270.21 2467.62,214.76 2619.76,214.76 v1(2645,240)
  L4 w4: v1(345,2595) 1565,2595 1640,2670 v1(1640,2760) ; v1(395,1255) 395,1090 505,980 505,870 550,825 1615,825 1667.21,772.79 1944.84,772.79 2020,697.63 2020,665 2045,640 2410,640 2450,600 2450,370 2470,350 2535,350 v1(2645,240) ; v1(1810,2755) 1920,2755 1970,2705 1970,2645 1985,2630 3295,2630 3480,2815 3480,3485 3450,3515 J4.1@3355.97,3515